# Altium PCB Mako DSP R1.2.PcbDoc (part 2 of 2)
Units mil, origin at the board's own origin, x right, y up, seen from the top; angles counter-clockwise.
Board outline 4500 x 2100 mil, 4 copper layers (Top Layer, GND, Power, Bottom Layer); 169 components, 129 nets, 625 pads, 177 vias.
Unrouted connection lines stored in the file: 86.
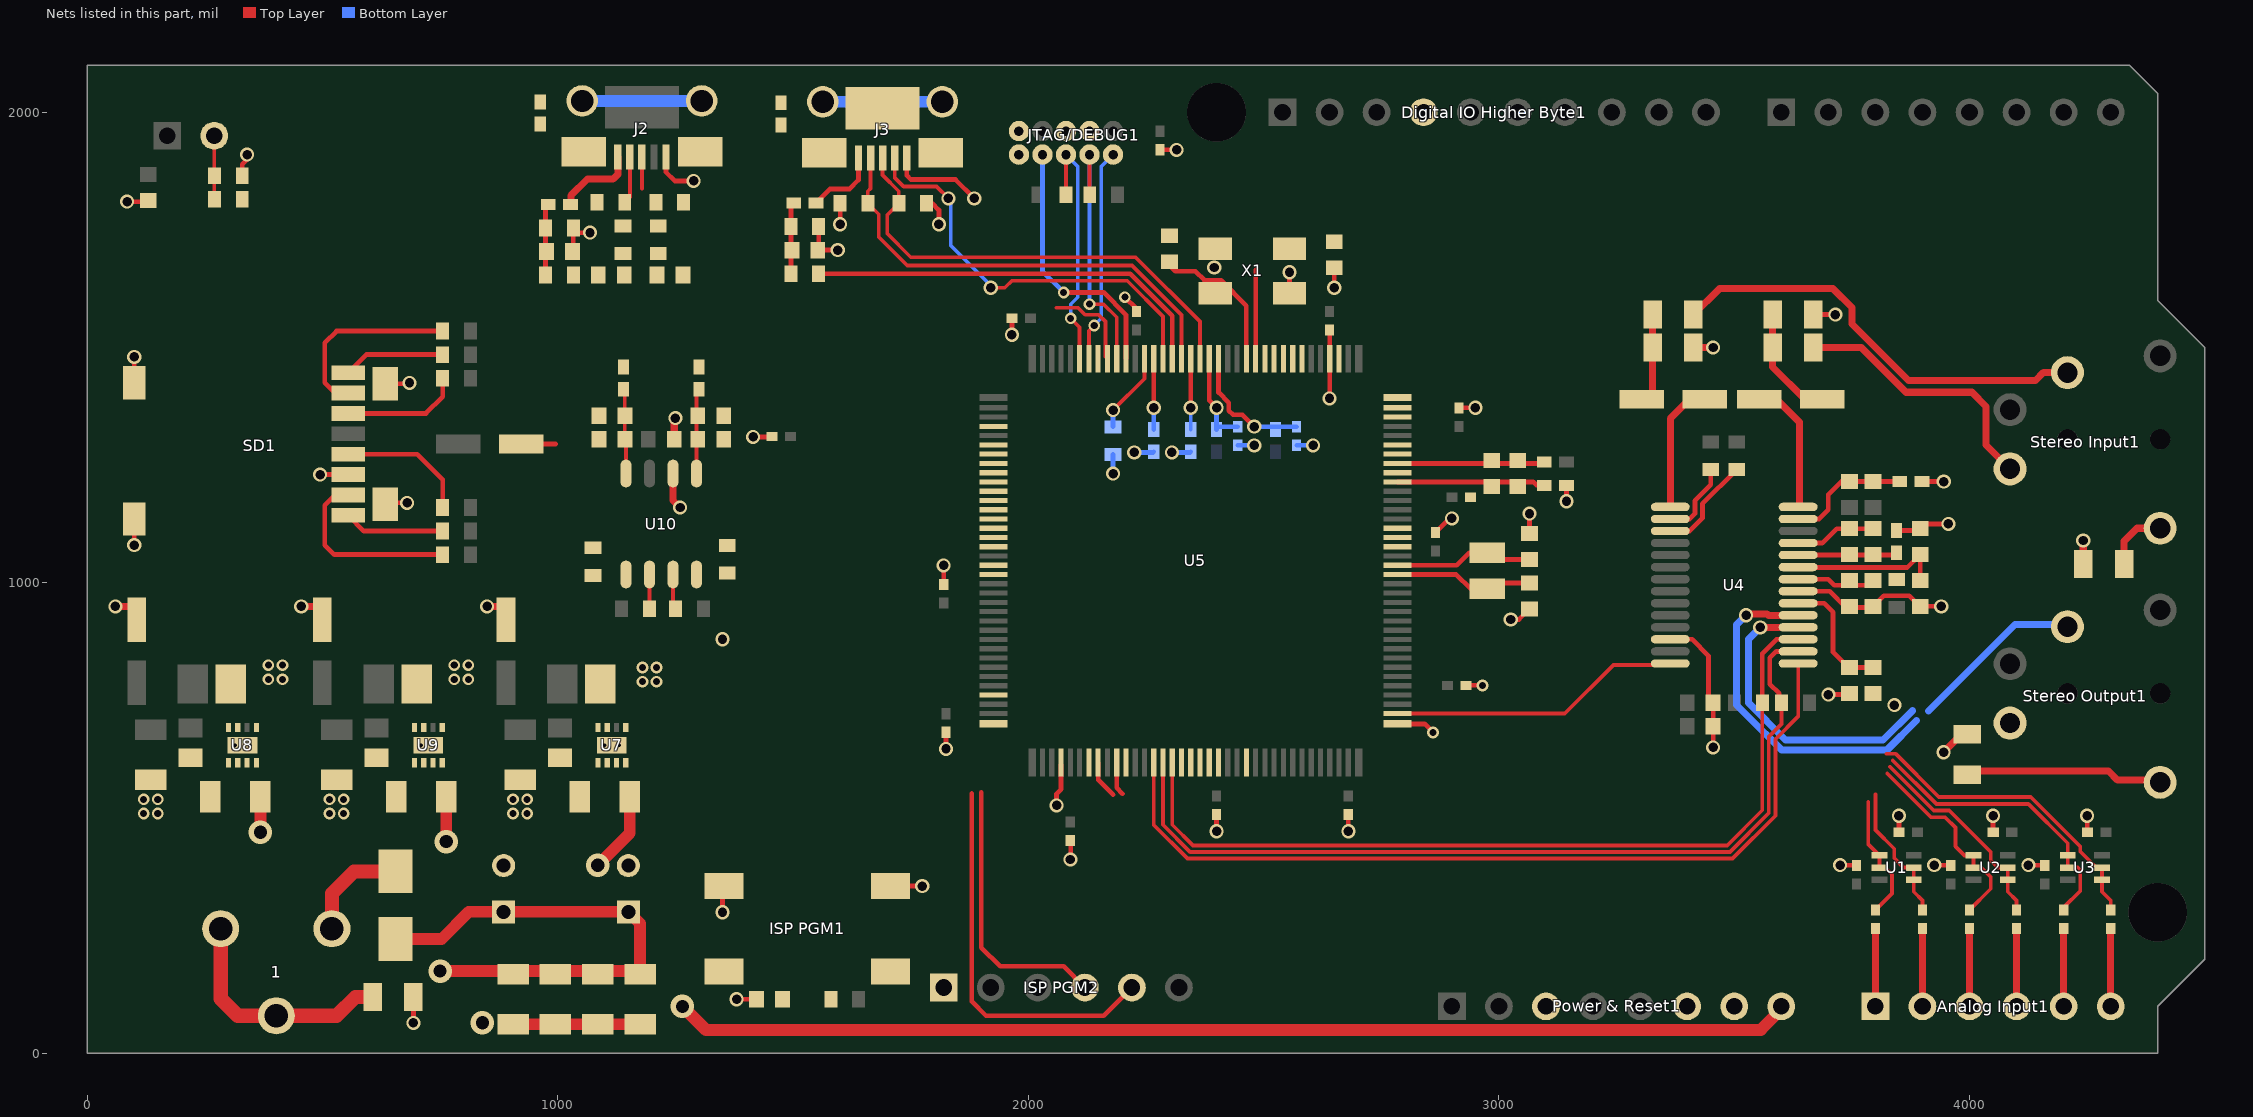
[diagram p4: the nets of this part, all layers, seen from the top]

## Via types
v1: diameter 30, hole 20, Top Layer to Bottom Layer, 120 vias
v2: diameter 25, hole 15, Top Layer to Bottom Layer, 43 vias
v3: diameter 50, hole 28, Top Layer to Bottom Layer, 8 vias
v4: diameter 19.68, hole 7.87, Top Layer to Bottom Layer, 6 vias

## Nets (pads, with @x,y where several pads share a name; then routed paths per layer and width w, separated by ;. In a path a pad name is that pad's centre, name@x,y a point inside that pad or via, vN(x,y) a via of type N, cw(c..) or ccw(c..) an arc to the next point about the centre after c; other vN are vias at no path point) (continued)
GND: "Digital IO Higher Byte1.4" "ISP PGM1.2" "ISP PGM2.1" "Power & Reset1.6" "Power & Reset1.7" C1.1 C2.1 C3.1 C4.1 C5.1 C6.1 C7.1 C8.1 C9.1 C12.1 C13.1 C16.1 C17.1 C18.1 C19.1 C21.1 C23.1 C24.1 C25.1 C26.1 C27.1 C28.1 C29.1 C30.2 C31.1 C32.2 C35.1 C36.1 C37.1 C38.1 C39.1 C40.1 C41.1 C42.1 C43.1 C44.1 C45.1 C46.1 C47.1 C48.1 C49.1 C50.1 C51.2 C52.2 C53.1 C54.1 C55.2 C56.1 C57.1 C58.2 C59.1 C60.1 C61.2 C62.1 C63.1 C64.1 C65.1 C66.1 C67.1 C68.1 C69.1 C70.1 C71.1 C72.1 C73.1 C74.1 FB3.2 FB4.2 FB6.1 FB11.2 FB12.2 FB13.2 FB14.2 FB15.2 FB16.1 FB17.2 J2.5 J3.5 J3.GND JTAG/DEBUG1.3 JTAG/DEBUG1.5 JTAG/DEBUG1.9 R8.1 R14.1 R16.1 R25.2 R29.2 R30.2 R31.2 R32.2 R33.2 R46.2 R47.1 RESET1.2 SD1.6 SD1.9 SD1.10 SD1.11 SD1.12 U4.12 U4.21 U5.4 U5.40 U5.76 U5.109 U7.1 U7.4 U7.5 U7.9 U8.1 U8.4 U8.5 U8.9 U9.1 U9.4 U9.5 U9.9 U10.6 X1.2 X1.4 | length 4268.5
  Top Layer w10: v1(85,1810) C27.1@127.56,1810 ; v1(100,1080) SD1.10@100,1135.55 ; SD1.9@100,1424.92 v1(100,1480) ; R14.1@329.53,1865 329.53,1889.53 340,1900 v1(340,1910) ; v1(495,1230) SD1.6@554.72,1230.04 SD1.6@554.72,1230.04 ; SD1.12@633.46,1167.05 636.42,1170 v1(680,1170) ; SD1.11@633.46,1422.95 682.95,1422.95 v1(685,1425) ; v1(693.31,65) FB16.1@693.31,120 ; C71.1@921.93,1295 995,1295 ; v1(970,2520) C28.1@970,2562.44 ; C67.1@1033.09,1706.01 R25.2@1033.09,1754.04 ; R25.2@1043.09,1744.04 v1(1068.56,1744.04) ; R16.1@1169.53,2615 1169.53,2634.53 1180,2645 v1(1180,2660) ; J2.5@1230,1905 1230,1872.6 1248.56,1854.04 v1(1288.56,1854.04) ; v1@1247.56,1347.56 v1(1250,1350) ; v1(1350,300) 1350,353.39 ; v1(1380,115) C26.1@1422.44,115 ; v1(1415,1310) C43.1@1454.57,1310 ; R29.2@1554.53,1757.05 1554.53,1709.02 C68.1@1552.56,1707.05 v1(1595,1707.05) ; v1(1600,1762.05) R33.2@1600,1806.22 ; 1707.17,355.55 v1(1774.45,355.55) ; J3.5@1741.44,1903.01 1741.44,1865.61 1750,1857.05 1845,1857.05 v1(1885,1817.05) ; R32.2@1783.8,1806.47 1795.57,1806.47 1810,1792.05 v1(1810,1762.05) ; C42.1@1820,996.73 v1(1820,1037.05) ; v1(1825,647.05) C41.1@1825,682.36 ; v1(1965,1527.05) 1965.32,1527.36 C44.1@1965.32,1562.05 ; v1(2060,527.05) 2060,552.05 2069.57,561.61 U5.76@2069.57,612.91 ; v1@2090,412.05 C40.1@2090,452.36 ; v2(2205,1607.05) 2230,1582.05 C46.1@2230,1576.73 ; C50.1@2280.31,1920 v1(2315,1920) ; v1(2400,472.05) C39.1@2400,507.36 ; X1.4@2555,1615.51 v1(2555,1660) ; C45.1@2640,1537.36 2640.43,1536.93 U5.4@2640.43,1476.18 v1@2640.43,1392.48 ; v1(2650,1627.05) C31.1@2650,1669.49 ; v1(2680,472.05) C38.1@2680,507.36 ; U5.109@2784.13,700.2 2841.85,700.2 v2(2860,682.05) ; C49.1@2869.68,1106.73 C49.1@2865,1106.73 2895.32,1137.05 v1(2900,1137.05) ; C47.1@2915,1372.05 v1(2950,1372.05) ; C37.1@2929.68,782.05 v2(2965,782.05) ; v1(3025,922.05) 3042.56,922.05 C35.1@3065,944.49 ; C36.1@3065,1104.61 v1(3065,1147.05) ; v1(3143.62,1173.43) FB6.1@3143.62,1207.05 ; U4.12@3364.17,879.84 3410.47,879.84 3445.16,845.16 3445.16,755.28 C8.1@3455.12,745.31 C9.1@3455.12,695.31 v1@3455.12,650.2 ; U4.21@3635.83,982.2 3702.8,982.2 3737.44,947.56 3787.44,947.56 C13.1@3795,940 ; C23.1@3673.31,1570 v1(3715,1570) ; v1(3700,762.56) C18.1@3742.56,762.56 ; v1(3725,400) 3759.69,400 C2.1@3760,399.68 ; C13.1@3795,950 3817.81,972.81 3872.19,972.81 C17.1@3895,950 v1(3940,950) ; FB17.2@3845,1111.18 3891.06,1111.18 C16.1@3895,1115.12 3905.04,1125.16 v1(3955.16,1125.16) ; v1(3850,505) 3850,470.32 C1.1@3850.31,470 ; FB13.2@3898.78,1215.16 v1(3945.16,1215.16) ; v1(3925,400) 3959.69,400 C4.1@3960,399.68 ; v1(4050,505) 4050,470.32 C3.1@4050.31,470 ; v1(4125,400) 4159.69,400 C6.1@4160,399.68 ; v1(4250,505) 4250,470.32 C5.1@4250.31,470
  Top Layer w15: v1(60,950) C58.2@105,950 ; v1(455,950) C61.2@505,950 ; v1(850,950) C55.2@890,950 ; U10.6@1245,1232.28 1245,1175 v1(1260,1160) ; C62.1@1247.56,1305 v1@1247.56,1347.56 ; C21.1@3413.31,1500 v1(3455,1500) ; v1(3945,640) FB15.2@3983.31,678.31 ; FB14.2@4241.69,1040 v1(4241.69,1090)
  Top Layer w25: C74.1@905,61.85 C7.1@995,61.85 C72.1@1085,61.85 C73.1@1175,61.85
  Bottom Layer w10: v1(2180,1232.05) R8.1@2180,1272.52 ; v1(2225,1277.05) 2265.04,1277.05 FB3.2@2266.42,1278.43 ; v1(2305,1277.05) 2343.62,1277.05 FB4.2@2345,1278.43 ; C25.1@2445,1292.36 2445.32,1292.05 v1(2480,1292.05) ; C24.1@2570.32,1292.05 v1(2605,1292.05)
  other v1: 2089.25,412.05 3455.16,650.16 3840.16,740.16 1350,880 2640,1392.05 2395,1670
  other v2: 120,510 150,510 515,510 545,510 905,510 935,510 120,540 150,540 515,540 545,540 905,540 935,540 1180,790 1210,790 385,795 415,795 780,795 810,795 1180,820 1210,820 385,825 415,825 780,825 810,825
  other v3: 840,65
  other v4: 314.25,655 345.75,655 709.25,655 740.75,655 1099.25,655 1130.75,655
I2C_CLK: R1.1 U4.17 U5.88 | length 1853.4
  Top Layer w8: U5.88@2305.79,617.91 2305.79,485.86 2349.6,442.05 3485,442.05 3559.53,516.57 R1.1@3559.53,742.05
  Top Layer w10: R1.1@3559.69,745.16 3559.69,849.68 3589.84,879.84 U4.17@3635.83,879.84
I2C_DATA: R2.1 U4.16 U5.87 | length 1879.4
  Top Layer w8: U5.87@2286.1,617.91 2286.1,485.74 2343.8,428.05 3490.8,428.05 3573.53,510.78 3573.53,670.37 ; 3573.69,673.48 3600.16,699.96 R2.1@3600.16,745.16
  Top Layer w10: R2.1@3595.16,755.16 3595.16,765.16 3575.69,784.63 3575.69,840.68 3589.25,854.25 U4.16@3635.83,854.25
LATCH_ENABLE: U4.15 U5.86 | length 1861.2
  Top Layer w8: U5.86@2266.42,617.91 2266.42,485.63 2338,414.05 3496.6,414.05 3587.53,504.98 3587.53,664.57 ; 3587.69,667.68 3635.83,715.83 U4.15@3635.83,828.66
MODE: U4.14 U5.110 | length 631.9
  Top Layer w8: U5.110@2775,722.05 3140,722.05 3243.5,825.55 U4.14@3364.02,825.55
Net1_1: 1.1 D2.2 | length 229.4
  Top Layer w30: 1.1@520,265 520,340 566.85,386.85 D2.2@655,386.85
Net1_2: 1.2 1.3 FB16.2 | length 503.3
  Top Layer w30: 1.2@283.78,265 283.78,116.22 320.04,79.96 1.3@401.89,79.96 529.96,79.96 570,120 FB16.2@606.69,120
"NetAnalog Input1_1": "Analog Input1.1" R34.1 | length 165.3
  Top Layer w15: 3800,100 R34.1@3800,265.32
"NetAnalog Input1_2": "Analog Input1.2" R35.1 | length 165.3
  Top Layer w15: 3900,100 R35.1@3900,265.32
"NetAnalog Input1_3": "Analog Input1.3" R36.1 | length 165.3
  Top Layer w15: 4000,100 R36.1@4000,265.32
"NetAnalog Input1_4": "Analog Input1.4" R37.1 | length 165.3
  Top Layer w15: 4100,100 R37.1@4100,265.32
"NetAnalog Input1_5": "Analog Input1.5" R38.1 | length 165.3
  Top Layer w15: 4200,100 R38.1@4200,265.32
"NetAnalog Input1_6": "Analog Input1.6" R39.1 | length 165
  Top Layer w15: 4300,100 R39.1@4300,265
NetC10_1: C10.1 C11.1 FB13.1 U4.27 | length 260.6
  Top Layer w10: U4.27@3635.83,1135.75 3680.56,1135.75 3700,1155.19 3700,1187.56 C10.1@3735,1222.56 ; C10.1@3745,1215.12 3745.04,1215.16 FB13.1@3851.54,1215.16
NetC12_2: C12.2 C13.2 R3.1 U4.22 | length 164.4
  Top Layer w10: U4.22@3635.83,1007.8 3699.83,1007.8 3712.51,995.12 3745,995.12 C13.2@3795,995.12
NetC14_1: C14.1 C15.1 FB17.1 U4.24 | length 209.2
  Top Layer w10: U4.24@3635.83,1058.98 FB17.1@3845,1058.98
NetC14_2: C14.2 C15.2 U4.25 | length 171.8
  Top Layer w10: U4.25@3635.83,1084.57 3687.01,1084.57 3717.56,1115.12 C15.2@3795,1115.12
NetC16_2: C16.2 C17.2 U4.23 | length 325.8
  Top Layer w10: U4.23@3635.83,1033.39 3636.65,1032.56 3867.56,1032.56 C16.2@3895,1060 C17.2@3895,1005.12
NetC18_2: C18.2 C19.2 U4.20 | length 265.5
  Top Layer w10: U4.20@3635.83,956.61 3690.94,956.61 3710,937.56 3710,852.56 3742.44,820.12 C19.2@3795,820.12
NetC20_1: C20.1 U4.1 | length 277.5
  Top Layer w15: U4.1@3364.17,1161.34 3364.17,1349.17 3405,1390 C20.1@3436.93,1390
NetC20_2: C20.2 C21.2 R4.1 | length 181.5
  Top Layer w15: C20.2@3323.07,1390 3326.69,1393.62 C21.2@3326.69,1500 R4.1@3326.69,1570
NetC22_1: C22.1 U4.28 | length 286.9
  Top Layer w15: C22.1@3553.07,1390 3590,1390 3638.66,1341.34 3638.66,1164.17 U4.28@3635.83,1161.34
NetC22_2: C22.2 C23.2 R5.1 | length 245.2
  Top Layer w15: C23.2@3581.69,1570 3581.69,1458.31 3650,1390 C22.2@3686.93,1390
NetC24_2: C24.2 FB2.2 U5.16 | length 277.4
  Top Layer w10: U5.16@2404.21,1476.18 2404.21,1404.6 2426,1382.82 2426,1366.05 2435,1357.05 2455,1357.05 v1(2480,1332.05)
  Bottom Layer w10: v1(2480,1332.05) 2480.31,1331.73 C24.2@2570,1331.73
NetC25_2: C25.2 FB1.2 U5.17 | length 195.9
  Top Layer w10: U5.17@2384.53,1476.18 2384.53,1387.52 v1(2400,1372.05)
  Bottom Layer w10: FB1.2@2400,1325.67 v1(2400,1372.05) ; FB1.2@2406.06,1331.73 C25.2@2445,1331.73
NetC26_2: "ISP PGM1.1" C26.2 R9.1 U5.96
NetC30_1: C30.1 U5.13 X1.3 | length 304.3
  Top Layer w10: C30.1@2305,1669.49 2312.44,1662.05 2355,1662.05 2374.49,1642.56 2397.52,1642.56 2409.49,1642.56 2463.27,1588.78 U5.13@2463.27,1476.18
NetC31_2: C31.2 U5.12 X1.1 | length 188.8
  Top Layer w10: U5.12@2482.95,1476.18 2482.95,1665
NetC63_2: C63.2 C64.2 FB7.1 U10.8 | length 177.7
  Top Layer w8: FB7.1@1140,1411.38 1142.56,1408.82 C64.2@1142.56,1355 C63.2@1142.56,1305 ; U10.8@1145,1232.28 C63.2@1145,1302.56
NetC65_2: C65.2 C66.2 FB8.1 U10.5 | length 181.2
  Top Layer w8: U10.5@1295,1232.28 1295,1406.38 FB8.1@1300,1411.38
NetC67_2: C67.2 FB9.1 R24.1 R25.1 | length 152.4
  Top Layer w10: R24.1@974.03,1654.04 R25.1@974.03,1754.04 974.03,1798.13 FB9.1@979.94,1804.04
NetC68_2: C68.2 FB10.1 R27.1 R29.1 | length 152.4
  Top Layer w10: R27.1@1495.47,1657.05 R29.1@1495.47,1757.05 1495.47,1801.14 FB10.1@1501.38,1807.05
NetDBGEN1_2: DBGEN1.2 R15.2 R16.2 | length 134.5
  Top Layer w8: R15.2@1110,2565.47 DBGEN1.2@1110,2700
NetFB3_1: FB3.1 U5.23 | length 150.5
  Top Layer w10: v1(2266.42,1372.05) U5.23@2266.42,1476.18
  Bottom Layer w10: FB3.1@2266.42,1325.67 v1(2266.42,1372.05)
NetFB4_1: FB4.1 U5.19 | length 150.6
  Top Layer w8: U5.19@2345,1476.02 U5.19@2345.16,1476.18
  Top Layer w10: v1(2345,1372.05) U5.19@2345,1476.02
  Bottom Layer w8: FB4.1@2345,1325.67 v1(2345,1372.05)
NetFB9_2: FB9.2 J2.1 | length 174.8
  Top Layer w15: FB9.2@1027.18,1804.04 1027.83,1804.69 1027.83,1823.46 1062.83,1858.46 1117.83,1858.46 1127.64,1868.27 J2.1@1127.64,1905
NetFB10_2: FB10.2 J3.1 | length 157.7
  Top Layer w10: FB10.2@1548.62,1807.05 1578.62,1837.05 1620,1837.05 1639.08,1856.13 J3.1@1639.08,1903.01
NetFB11_1: FB11.1 J2.6 J2.7 J2.8 J2.9 | length 253.9
  Bottom Layer w25: J2.7@1051.85,2024.09 J2.8@1305.79,2024.09
NetFB12_1: FB12.1 J3.6 J3.7 J3.8 J3.9 | length 253.9
  Bottom Layer w25: J3.7@1563.29,2022.1 J3.8@1817.23,2022.1
NetFB14_1: "Stereo Input1.5" FB14.1 | length 136.5
  Top Layer w15: FB14.1@4328.31,1040 4328.31,1088.31 4356.02,1116.02 4405,1116.02
NetFB15_1: "Stereo Output1.5" FB15.1 | length 406.2
  Top Layer w15: FB15.1@4006.69,600 4295,600 4313.98,581.02 4405,581.02
"NetISP PGM2_4": "ISP PGM2.4" U5.82 | length 656.2
  Top Layer w10: 1900,555 1900,225 1940,185 2075,185 2120,140 ; U5.82@2187.68,617.91 2187.68,564.37 2200,552.05
"NetISP PGM2_5": "ISP PGM2.5" U5.80 | length 901.7
  Top Layer w10: 1880,552.37 1880,157.31 1879.47,156.79 1879.47,110.53 1910,80 2160,80 2220,140 ; U5.80@2148.31,617.91 2148.31,581.11 2180,549.42
NetJ3_4: J3.4 U5.22 | length 897.2
  Top Layer w8: J3.4@1715.85,1903.01 1715.85,1861.2 1735,1842.05 1805,1842.05 v1(1830,1817.05) ; v1(1920,1627.05) 1950,1627.05 1965,1642.05 2210,1642.05 2286.1,1565.94 U5.22@2286.1,1476.18
  Bottom Layer w8: v1(1830,1817.05) 1835,1812.05 1835,1717.05 v1@1925,1627.05
NetL1_1: L1.1 U7.7
NetL2_1: L2.1 U8.7
NetL3_1: L3.1 U9.7
NetR4_2: "Stereo Input1.4" R4.2 | length 925.8
  Top Layer w15: R4.2@3413.31,1570 3468.31,1625 3710,1625 3750,1585 3750,1550 3870,1430 4140,1430 4156.73,1446.73 4208.15,1446.73
NetR5_2: "Stereo Input1.1" R5.2 | length 585.9
  Top Layer w15: R5.2@3668.31,1500 R5.2@3673.31,1500 ; R5.2@3673.31,1486.69 R5.2@3673.31,1500 ; 4086.1,1242.01 4035,1293.11 4035,1375 4005,1405 3865,1405 3770,1500 R5.2@3673.31,1500
NetR6_2: R6.2 U4.2 | length 164.6
  Top Layer w10: U4.2@3364.17,1135.75 3405.75,1135.75 3416.51,1146.51 3416.51,1174.61 3450,1208.1 R6.2@3450,1240.47
NetR7_2: R7.2 U4.3 | length 212.7
  Top Layer w10: U4.3@3364.17,1110.16 3405.16,1110.16 3432.51,1137.51 3432.51,1167.98 R7.2@3505,1240.47
NetR8_2: R8.2 U5.24 | length 172.2
  Top Layer w8: v1(2180,1367.05) 2246.73,1433.78 U5.24@2246.73,1476.18
  Bottom Layer w10: R8.2@2180,1331.57 v1(2180,1367.05)
NetR13_2: R13.2 R14.2 TRST1.2 | length 134.5
  Top Layer w8: R13.2@270,1815.47 TRST1.2@270,1950
NetR15_1: R15.1 U5.28 | length 216.5
  Top Layer w8: 1164.53,2545.47 R15.1@1164.53,2565 ; 2059.63,1584.55 2105.68,1584.55 2120.68,1569.55 2149.32,1569.55 2163.82,1555.05 2163.82,1480.35 U5.28@2167.99,1476.18
NetR19_1: R19.1 U7.8
NetR20_1: R20.1 U8.8
NetR21_1: R21.1 U9.8
NetR22_2: R22.2 U5.83 U10.3 | length 75
  Top Layer w8: U10.3@1245,1017.72 1245,950.47 R22.2@1250.47,945
NetR23_2: R23.2 U5.72 U10.2 | length 72.9
  Top Layer w8: R23.2@1194.53,945 1195,945.47 U10.2@1195,1017.72
NetR34_2: R34.2 U1.1 U1.2 | length 273.1
  Top Layer w8: 3785,535 3785,444.17 U1.1@3808.58,420.59 U1.2@3808.58,395 3821.07,395 3835.31,380.76 3835.31,340 R34.2@3800,304.69
NetR35_2: R35.2 U1.4 U1.5 | length 299.3
  Top Layer w8: 3800,550 3800,475 3840,435 3840,415 3860,395 U1.5@3881.42,395 U1.4@3881.42,369.41 3881.42,343.58 3900,325 R35.2@3900,304.69
NetR36_2: R36.2 U2.1 U2.2 | length 438.5
  Top Layer w8: 3825,595 3918,502 3948,502 3970,480 3970,440 3989.41,420.59 U2.1@4008.58,420.59 U2.2@4008.58,395 4025,395 4045,375 4045,350 4000,305 R36.2@4000,304.69
NetR37_2: R37.2 U2.4 U2.5 | length 447.7
  Top Layer w8: 3830.8,609 3923.8,516 3956.8,516 4045,427.8 4045,410 4060,395 U2.5@4081.42,395 U2.4@4081.42,369.41 4081.42,343.58 4100,325 R37.2@4100,304.69
NetR38_2: R38.2 U3.1 U3.2 | length 625.1
  Top Layer w8: 3836.6,623 3929.6,530 4125,530 4208.58,446.42 U3.1@4208.58,420.59 U3.2@4208.58,395 4230,395 4235.31,389.68 4235.31,345.32 4200,310 R38.2@4200,304.69
NetR39_2: R39.2 U3.4 U3.5 | length 663
  Top Layer w8: 3823,637 3842.4,637 3934.4,545 4130,545 4235.31,439.68 4235.31,428.93 4269.24,395 U3.5@4281.42,395 U3.4@4281.42,369.41 4281.42,343.58 4300,325 R39.2@4300,304.69
NetR40_2: R40.2 SD1.1 U5.55 | length 216.7
  Top Layer w10: SD1.1@554.72,1446.57 593.15,1485 R40.2@755.47,1485
NetR41_2: R41.2 SD1.2 U5.56 | length 404.6
  Top Layer w10: SD1.2@554.72,1403.27 526.73,1403.27 505,1425 505,1510 530,1535 R41.2@755.47,1535
NetR42_2: R42.2 SD1.3 U5.50 | length 255
  Top Layer w10: SD1.3@554.72,1359.96 719.96,1359.96 755.47,1395.47 R42.2@755.47,1435
NetR43_2: R43.2 SD1.5 U5.45 | length 282.6
  Top Layer w10: SD1.5@554.72,1273.35 701.65,1273.35 755.47,1219.53 R43.2@755.47,1160
NetR44_2: R44.2 SD1.7 U5.52 | length 402.5
  Top Layer w10: SD1.7@554.72,1186.73 526.73,1186.73 505,1165 505,1080 525,1060 R44.2@755.47,1060
NetR45_2: R45.2 SD1.8 U5.53 | length 214.6
  Top Layer w10: SD1.8@554.72,1143.43 588.15,1110 R45.2@755.47,1110
NetR46_1: R46.1 U5.69 U10.1
NetR47_2: R47.2 U5.79 U10.4
NetRTCALARM1_1: RTCALARM1.1 U5.129
"NetStereo Output1_1": "Stereo Output1.1" U4.19 | length 759
  Top Layer w15: v1(3525.16,931.02) 3527.79,933.66 3570.03,933.66 3572.67,931.02 U4.19@3635.83,931.02
  Bottom Layer w15: v1(3525.16,931.02) 3505.16,911.02 3505.16,740.16 3566.66,678.66 3566.96,678.66 3600.46,645.16 3825.16,645.16 3887.17,707.17
"NetStereo Output1_4": "Stereo Output1.4" U4.18 | length 1029.6
  Top Layer w15: v1(3555.16,905.16) 3635.55,905.16 U4.18@3635.83,905.43
  Bottom Layer w15: v1(3555.16,905.16) 3530.16,880.16 3530.16,745.16 3609.16,666.16 3816.46,666.16 3878.47,728.17 ; 3912.53,728.01 4096.25,911.73 4208.15,911.73
NetU5_3: U5.3
NetU5_7: U5.7
NetU5_8: U5.8
NetU5_9: U5.9
NetU5_10: U5.10
NetU5_11: U5.11
NetU5_42: U5.42
NetU5_43: U5.43
NetU5_44: U5.44
NetU5_46: U5.46
NetU5_47: U5.47
NetU5_48: U5.48
NetU5_49: U5.49
NetU5_51: U5.51
NetU5_92: U5.92
NetU5_93: U5.93
NetU5_130: U5.130 WAKEUP1.1
NetU5_136: U5.136
NetU5_138: U5.138
NetU5_139: U5.139
NetU5_142: U5.142
NetU5_143: U5.143
NetU5_144: U5.144
RESET: "Power & Reset1.3" C29.2 JTAG/DEBUG1.10 R12.1 RESET1.1 U5.128
RTCX1: C35.2 U5.125 X2.1 | length 298.7
  Top Layer w10: U5.125@2784.13,1017.52 2909.53,1017.52 2940,987.05 X2.1@2975,987.05 2987.56,999.61 C35.2@3065,999.61
RTCX2: C36.2 U5.126 X2.2 | length 297.8
  Top Layer w10: U5.126@2784.13,1037.2 2910.16,1037.2 2936.77,1063.82 X2.2@2975,1063.82 2989.33,1049.49 C36.2@3065,1049.49
TCK/SWDCLK: JTAG/DEBUG1.4 R18.1 U5.27 | length 556.9
  Top Layer w8: v2(2130,1592.05) 2160,1592.05 2187.68,1564.37 U5.27@2187.68,1476.18 ; R18.1@2130,1825.47 JTAG/DEBUG1.4@2130,1910
  Bottom Layer w8: v2@2130,1595 JTAG/DEBUG1.4@2130,1910
TDI: JTAG/DEBUG1.8 U5.26 | length 554.1
  Top Layer w10: v2(2075,1617.05) 2160,1617.05 2207.36,1569.68 U5.26@2207.36,1476.18
  Bottom Layer w10: 2030,1662.05 v2(2075,1617.05) ; 2030,1665 JTAG/DEBUG1.8@2030,1910
TDO/SWO: JTAG/DEBUG1.6 R17.1 U5.31 | length 539.8
  Top Layer w8: R17.1@2080,1825.47 JTAG/DEBUG1.6@2080,1910 ; v2(2090,1562.05) 2108.94,1543.11 U5.31@2108.94,1476.18
  Bottom Layer w8: JTAG/DEBUG1.6@2080,1910 2105,1885 2105,1610 ; v2(2090,1562.05) 2090,1592.05 2105,1607.05
TMS/SWDIO: JTAG/DEBUG1.2 U5.30 | length 452.1
  Top Layer w8: U5.30@2128.62,1476.18 2128.62,1535.67 v2(2140,1547.05)
  Bottom Layer w8: v2(2140,1547.05) 2155,1562.05 ; 2155,1565 2155,1885 JTAG/DEBUG1.2@2180,1910
TRST: R13.1 U5.29
USB0_N: J3.2 R33.1 U5.20 | length 985.3
  Top Layer w8: J3.2@1664.67,1903.01 1664.67,1837.91 1658.8,1832.05 R33.1@1658.8,1806.47 1682,1783.28 1682,1734.59 1742.54,1674.05 2220.43,1674.05 2325.47,1569 U5.20@2325.47,1476.18
USB0_P: J3.3 R32.1 U5.18 | length 1006.7
  Top Layer w8: J3.3@1690.26,1903.01 1690.26,1866.54 1724.75,1832.05 R32.1@1724.75,1806.47 1700,1781.72 1700,1742.05 1750,1692.05 2227.88,1692.05 2364.84,1555.09 U5.18@2364.84,1476.18
USB0_VBUS: FB7.2 R24.2 U5.91
USB1_N: J2.2 R26.2 R31.1 | length 85.7
  Top Layer w8: R31.1@1153.23,1819.33 J2.2@1153.23,1905
USB1_P: J2.3 R28.2 R30.1 | length 67
  Top Layer w8: 1178.82,1837.95 J2.3@1178.82,1905
USB1_VBUS: FB8.2 R27.2 U5.21 | length 884.7
  Top Layer w10: R27.2@1554.53,1657.05 2205,1657.05 ; 2200,1657.05 2216.21,1657.05 2305.79,1567.47 U5.21@2305.79,1476.18
USB_1_N: C69.2 R26.1 U5.90
USB_1_P: C70.2 R28.1 U5.89
VDDA: C33.2 C34.2 FB5.2 U5.137 | length 313.6
  Top Layer w10: U5.137@2784.13,1253.74 3093.07,1253.74 FB5.2@3096.38,1257.05
VIN: "Power & Reset1.8" C7.2 C51.1 C52.1 C53.2 C56.2 C59.2 C72.2 C73.2 C74.2 D2.1 U7.2 U7.3 U8.2 U8.3 U9.2 U9.3 | length 3803.5
  Top Layer w15: 3600,93.5 3600,100
  Top Layer w25: v3@368.15,470 C56.2@368.15,545 ; D2.1@655,243.15 753.15,243.15 810.79,300.79 C52.1@885,300.79 C51.1@1150,300.79 1175,275.79 C73.2@1175,168.15 ; v3(750,175) C73.2@1168.15,175 ; v3(763.15,450) C59.2@763.15,545 ; v3(1085,400) 1153.15,468.15 C53.2@1153.15,545 ; 3556.5,50 3600,93.5
  Top Layer w26: v3(1265,100) 1315,50 3556.5,50
  other v3: 368.15,470
VSSA: C33.1 C34.1 FB6.2 U5.135 | length 315.3
  Top Layer w10: U5.135@2784.13,1214.37 3072.68,1214.37 3080,1207.05 FB6.2@3096.38,1207.05
pads on no net: "Digital IO Higher Byte1.1" "Digital IO Higher Byte1.2" "Digital IO Higher Byte1.3" "Digital IO Higher Byte1.5" "Digital IO Higher Byte1.6" "Digital IO Higher Byte1.7" "Digital IO Higher Byte1.8" "Digital IO Higher Byte1.9" "Digital IO Higher Byte1.10" "Digital IO Lower Byte1.1" "Digital IO Lower Byte1.2" "Digital IO Lower Byte1.3" "Digital IO Lower Byte1.4" "Digital IO Lower Byte1.5" "Digital IO Lower Byte1.6" "Digital IO Lower Byte1.7" "Digital IO Lower Byte1.8" "ISP PGM2.2" "ISP PGM2.6" "Power & Reset1.1" "Stereo Input1.3" "Stereo Input1.6" "Stereo Input1." "Stereo Output1.3" "Stereo Output1.6" "Stereo Output1." J2.4 J2.GND JTAG/DEBUG1.1@2255.59,1991.5 JTAG/DEBUG1.7 U5.1 U5.2 U5.6 U5.15 U5.32 U5.33 U5.34 U5.35 U5.37 U5.38 U5.39 U5.54 U5.57 U5.58 U5.60 U5.61 U5.62 U5.63 U5.64 U5.65 U5.66 U5.67 U5.68 U5.70 U5.73 U5.74 U5.75 U5.78 U5.81 U5.84 U5.85 U5.95 U5.97 U5.98 U5.99 U5.100 U5.101 U5.102 U5.103 U5.104 U5.105 U5.106 U5.108 U5.115 U5.117 U5.121 U5.122 U5.123 U5.124 U5.132 U5.133 U5.134 U5.140

## Polygon pours and split planes (outlines as drawn)
NetC26_2 on Top Layer "Power Plane-No Net" (solid, remove dead copper, pour order 43): 1304.31,206.28 1304.31,141.28 1459.31,141.28 1459.31,91.28 1599.31,91.28 1599.31,141.28 1754.31,141.28 1754.31,211.28 1304.31,211.28 1304.31,201.28
RESET on Top Layer "Power Plane-No Net" (solid, remove dead copper, pour order 44): 2905.61,-413.72 2905.61,-478.72 3060.61,-478.72 3060.61,-528.72 3200.61,-528.72 3200.61,-478.72 3355.61,-478.72 3355.61,-408.72 2905.61,-408.72 2905.61,-418.72
NetFB11_1 on Top Layer "Power Plane-No Net" (solid, remove dead copper, pour order 24): 932.83,2068.46 1392.83,2068.46 1392.83,1838.46 932.83,1838.46
NetFB12_1 on Top Layer "Power Plane-No Net" (solid, remove dead copper, pour order 23): 1444.28,2061.47 1904.28,2061.47 1904.28,1846.47 1444.28,1846.47
VIN on Top Layer "Power Plane-No Net" (solid, remove dead copper, pour order 27): 310,495 405,495 405,600 345,600 345,635 310,635
VIN on Top Layer "Power Plane-No Net" (solid, remove dead copper, pour order 26): 705,495 800,495 800,600 740,600 740,635 705,635
VIN on Top Layer "Power Plane-No Net" (solid, remove dead copper, pour order 25): 1095,495 1190,495 1190,600 1130,600 1130,635 1095,635
5VCC on Top Layer "Power Plane-No Net" (solid, remove dead copper, pour order 33): 70,650 185,650 185,665 250,665 250,735 265,735 265,845 70,845
NetR20_1 on Top Layer "Power Plane-No Net" (solid, remove dead copper, pour order 39): 185,665 185,600 280,600 280,635 310,635 310,710 250,710 250,665 185,665
NetL2_1 on Top Layer "Power Plane-No Net" (solid, remove dead copper, pour order 42): 265,845 355,845 355,715 335,715 335,675 305,675 305,710 265,710
DVDD on Top Layer "Power Plane-No Net" (solid, remove dead copper, pour order 32): 465,650 580,650 580,665 645,665 645,735 660,735 660,845 465,845
AVDD on Top Layer "Power Plane-No Net" (solid, remove dead copper, pour order 31): 855,650 970,650 970,665 1035,665 1035,735 1050,735 1050,845 855,845
NetR21_1 on Top Layer "Power Plane-No Net" (solid, remove dead copper, pour order 38): 580,665 580,600 675,600 675,635 705,635 705,710 645,710 645,665 580,665
NetR19_1 on Top Layer "Power Plane-No Net" (solid, remove dead copper, pour order 37): 970,665 970,600 1065,600 1065,635 1095,635 1095,710 1035,710 1035,665 970,665
GND on Top Layer "Power Plane-No Net" (solid, remove dead copper, pour order 30): 310,495 70,495 70,650 185,650 185,600 280,600 280,635 310,635
NetL3_1 on Top Layer "Power Plane-No Net" (solid, remove dead copper, pour order 41): 660,845 750,845 750,715 730,715 730,675 700,675 700,710 660,710
GND on Top Layer "Power Plane-No Net" (solid, remove dead copper, pour order 29): 705,495 465,495 465,650 580,650 580,600 675,600 675,635 705,635
GND on Top Layer "Power Plane-No Net" (solid, remove dead copper, pour order 28): 1095,495 855,495 855,650 970,650 970,600 1065,600 1065,635 1095,635
NetL1_1 on Top Layer "Power Plane-No Net" (solid, remove dead copper, pour order 40): 1050,845 1140,845 1140,715 1120,715 1120,675 1090,675 1090,710 1050,710
GND on Top Layer "Power Plane-No Net" (solid, remove dead copper, pour order 36): 290,630 370,630 370,600 405,600 405,495 455,495 455,845 365,845 365,680 290,680
GND on Top Layer "Power Plane-No Net" (solid, remove dead copper, pour order 35): 685,630 765,630 765,600 800,600 800,495 850,495 850,845 760,845 760,680 685,680
GND on Top Layer "Power Plane-No Net" (solid, remove dead copper, pour order 34): 1075,630 1155,630 1155,600 1190,600 1190,495 1240,495 1240,845 1150,845 1150,680 1075,680
GND on GND (split plane): 4379.9,2031.68 4379.9,1600 4380.29,1596.08 4381.43,1592.31 4383.29,1588.83 4385.79,1585.79 4479.9,1491.68 4479.9,208.32 4385.79,114.21 4383.29,111.17 4381.43,107.69 4380.29,103.92 4379.9,100 4379.9,20.1 20.1,20.1 20.1,2079.9 4331.68,2079.9
no net on Power (split plane): 1884.75,1989.98 1889.38,1988.86 1893.78,1987.04 1897.84,1984.55 1901.46,1981.46 1904.55,1977.84 1907.04,1973.78 1908.86,1969.38 1909.98,1964.75 1910.35,1960 1909.98,1955.25 1908.86,1950.62 1907.04,1946.22 1904.55,1942.16 1901.46,1938.54 1897.84,1935.45 1893.78,1932.96 1889.38,1931.14 1884.75,1930.02 1880,1929.65 1875.25,1930.02 1870.62,1931.14 1866.22,1932.96 1862.16,1935.45 1858.54,1938.54 1855.45,1942.16 1852.96,1946.22 1851.14,1950.62 1850.02,1955.25 1849.65,1960 1850.02,1964.75 1851.14,1969.38 1852.96,1973.78 1855.45,1977.84 1858.54,1981.46 1862.16,1984.55 1866.22,1987.04 1870.62,1988.86 1875.25,1989.98 1880,1990.35
DVDD on Power (split plane): 1184.9,265.1 1115.1,265.1 1115.1,334.9 1184.9,334.9
DVDD on Power (split plane): 3249.9,132.89 3249.9,20.1 1345.1,20.1 1345.1,194.9 3187.89,194.9
DVDD on Power (split plane): 919.9,265.1 850.1,265.1 850.1,334.9 919.9,334.9
AVDD on Power (split plane): 4379.9,1600 4380.29,1596.08 4381.43,1592.31 4383.29,1588.83 4385.79,1585.79 4479.9,1491.68 4479.9,208.32 4385.79,114.21 4383.29,111.17 4381.43,107.69 4380.29,103.92 4379.9,100 4379.9,20.1 3260.1,20.1 3260.1,135 3259.71,136.95 3258.6,138.6 3193.6,203.6 3191.95,204.71 3190,205.1 1342.11,205.1 1255.1,292.11 1255.1,750 1254.71,751.95 1253.6,753.6 1178.6,828.6 1176.95,829.71 1175,830.1 805.1,830.1 805.1,919.9 1322.89,919.9 1369.9,872.89 1369.9,450 1370.29,448.05 1371.4,446.4 1506.4,311.4 1508.05,310.29 1510,309.9 2865,309.9 2866.95,310.29 2868.6,311.4 2923.6,366.4 2923.61,366.4 3092.11,534.9 3320,534.9 3321.95,535.29 3323.6,536.4 3398.6,611.4 3399.71,613.05 3400.1,615 3400.1,820 3399.71,821.95 3398.6,823.6 3260.1,962.11 3260.1,1702.89 3332.11,1774.9 4379.9,1774.9
DVDD on Power (split plane): 4379.9,2031.68 4379.9,1785.1 3330,1785.1 3328.05,1784.71 3326.4,1783.6 3251.4,1708.6 3250.29,1706.95 3249.9,1705 3249.9,960 3250.29,958.05 3251.4,956.4 3389.9,817.89 3389.9,617.11 3317.89,545.1 3090,545.1 3088.05,544.71 3086.4,543.6 2916.4,373.61 2916.4,373.6 2862.89,320.1 1512.11,320.1 1380.1,452.11 1380.1,875 1379.71,876.95 1378.6,878.6 1328.6,928.6 1326.95,929.71 1325,930.1 800,930.1 798.05,929.71 796.4,928.6 795.29,926.95 794.9,925 794.9,825 795.29,823.05 796.4,821.4 798.05,820.29 800,819.9 1172.89,819.9 1244.9,747.89 1244.9,600.1 20.1,600.1 20.1,2079.9 4331.68,2079.9
VIN on Power (split plane): 1244.9,290 1245.29,288.05 1246.4,286.4 1334.9,197.89 1334.9,20.1 20.1,20.1 20.1,589.9 1244.9,589.9

## Keep-outs
Keep-Out Layer:
  lines w10: 25,25 25,2075 4330,2075 4375,2030 4375,1590 4475,1490 4475,215 4375,115 4375,25 25,25

## Other copper
Power (plane layer: these items are gaps in the copper):
  circle w10: c1880,1960 r35.36
  lines w10: 0,595 1250,595 ; 1340,10 1340,200 ; 3255,0 3255,135 3190,200 1340,200 ; 4400,1780 3330,1780 3255,1705 3255,960 3395,820 3395,615 3320,540 3090,540 2920,370 2865,315 1510,315 1375,450 1375,875 1325,925 800,925 800,825 1175,825 1250,750 1250,290 1340,200 ; 845,260 925,260 925,340 845,340 845,260 ; 1110,260 1110,340 1190,340 1190,260 1110,260

## Silkscreen, mask and mechanical layers (free items; w line width, h text height)
Top Overlay:
  text "Designed By" at 3699,1752 h70
  text "Adam J. Vadala-Roth" at 3697,1698 h70
  text "d" at 3694,1616 h150
Mechanical 15:
  circle w5: c2400,2000 r62.5
  circle w5: c4400,300 r62.5
  lines w5: 0,0 4400,0 4400,100 4500,200 4500,1500 4400,1600 4400,2040 4340,2100 0,2100 0,0

## Text inside footprints (layer, text, board x,y; h text height)
"Analog Input1": Top Overlay "A0" at 3820,160 h78.74 r90; Top Overlay "A1" at 3920,160 h78.74 r90; Top Overlay "A2" at 4020,160 h78.74 r90; Top Overlay "A3" at 4125,160 h78.74 r90; Top Overlay "A4" at 4225,160 h78.74 r90; Top Overlay "A5" at 4325,160 h78.74 r90
C51: Top Overlay "+" at 1240,280 h59.06 r90
C52: Top Overlay "+" at 975,280 h59.06 r90
"Digital IO Higher Byte1": Top Overlay "SCL" at 2565,1815 h78.74 r90; Top Overlay "SDA" at 2655,1810 h78.74 r90; Top Overlay "AREF" at 2760,1770 h78.74 r90; Top Overlay "GND" at 2865,1805 h78.74 r90; Top Overlay "~ 13" at 2965,1800 h78.74 r90; Top Overlay "12" at 3065,1855 h78.74 r90; Top Overlay "~ 11" at 3160,1795 h78.74 r90; Top Overlay "~ 10" at 3265,1795 h78.74 r90; Top Overlay "~ 9" at 3365,1835 h78.74 r90; Top Overlay "8" at 3465,1890 h78.74 r90
"Digital IO Lower Byte1": Top Overlay "7" at 3625,1895 h78.74 r90; Top Overlay "~ 6" at 3725,1835 h78.74 r90; Top Overlay "~ 5" at 3825,1835 h78.74 r90; Top Overlay "4" at 3925,1890 h78.74 r90; Top Overlay "~ 3" at 4025,1835 h78.74 r90; Top Overlay "2" at 4125,1890 h78.74 r90; Top Overlay "TX 1" at 4220,1790 h78.74 r90; Top Overlay "RX 0" at 4325,1785 h78.74 r90
"Power & Reset1": Top Overlay "IOREF" at 3025,170 h78.74 r90; Top Overlay "RESET" at 3120,170 h78.74 r90; Top Overlay "3.3V" at 3225,170 h78.74 r90; Top Overlay "5V" at 3320,170 h78.74 r90; Top Overlay "GND" at 3420,170 h78.74 r90; Top Overlay "GND" at 3525,170 h78.74 r90; Top Overlay "VIN" at 3625,170 h78.74 r90